# Altium PCB NodeCardWithCanBackup.PcbDoc
Units mm, origin at the board's own origin, x right, y up, seen from the top; angles counter-clockwise.
Board outline 199 x 48.5 mm, 8 copper layers (Top Layer, Internal Plane 1, Internal Plane 2, Internal Plane 3, Internal Plane 4, Internal Plane 5, Internal Plane 6, Bottom Layer), stack 0.605 mm thick; 93 components, 51 nets, 319 pads, 0 vias.
Unrouted connection lines stored in the file: 144.
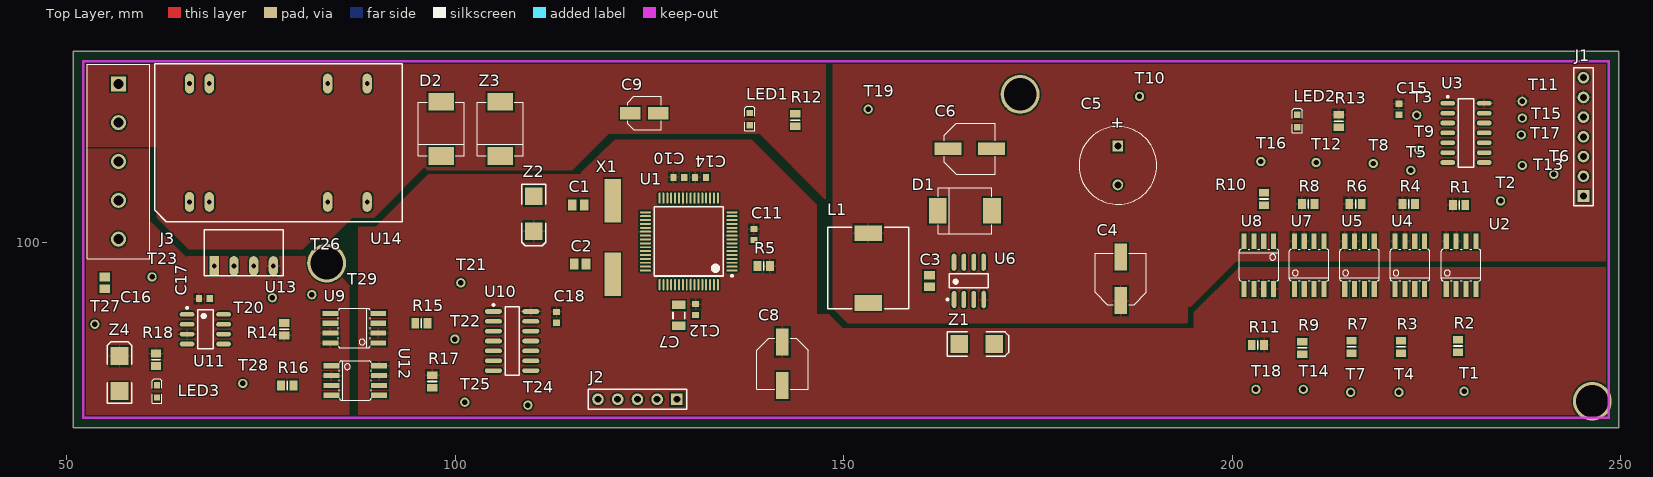
[diagram p0: Top Layer view]
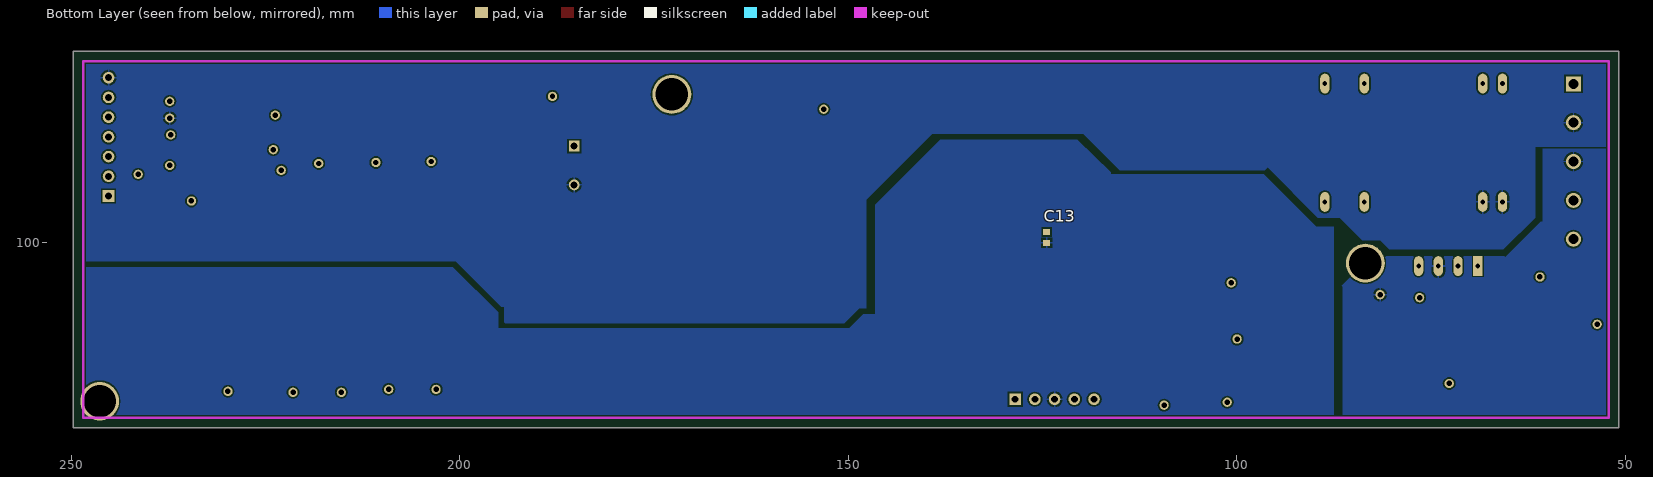
[diagram p1: Bottom Layer view, seen from below]
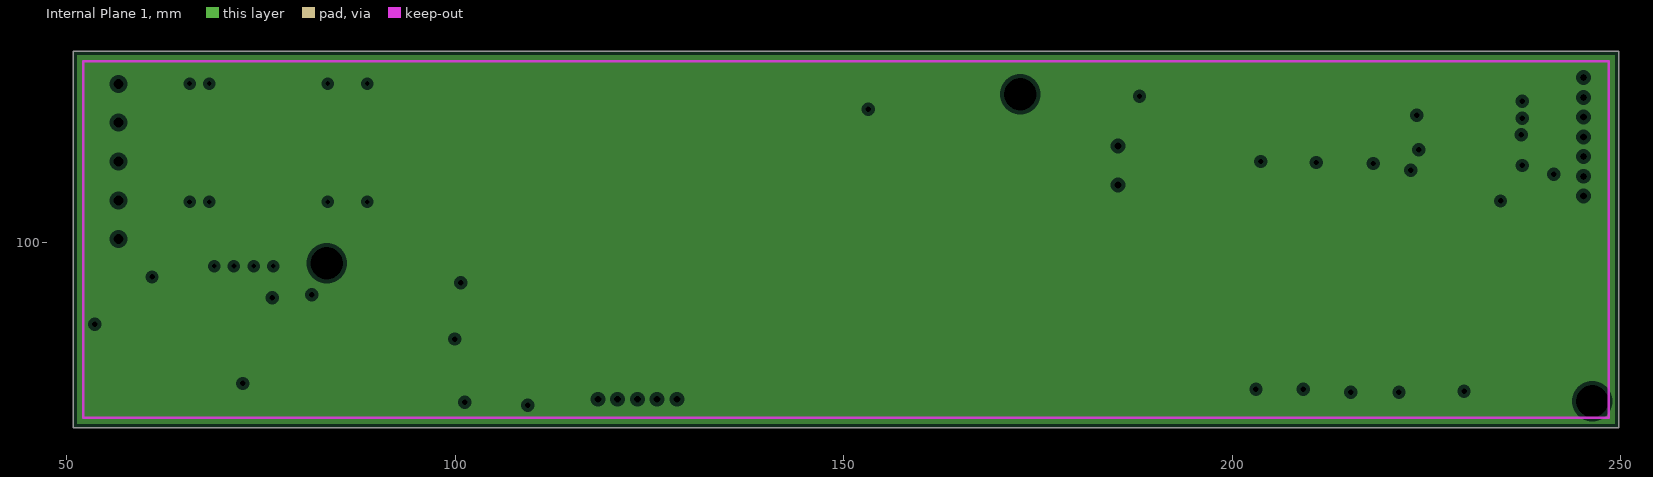
[diagram p2: Internal Plane 1, clearances drawn from the general rule]
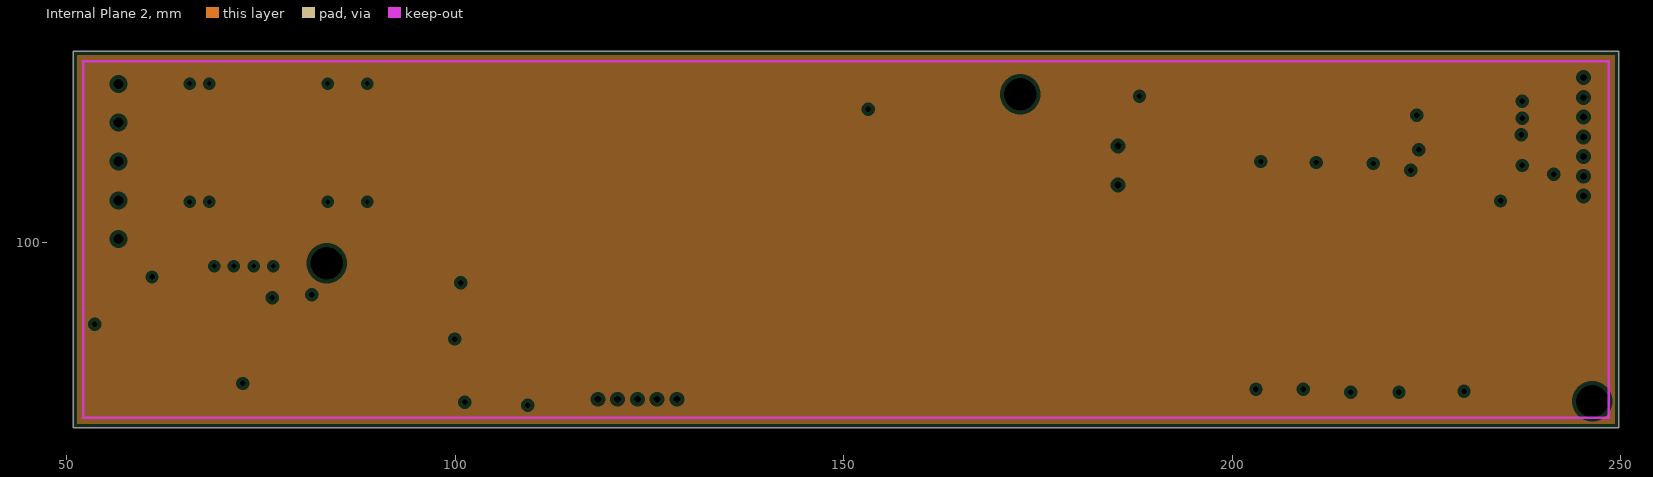
[diagram p3: Internal Plane 2, clearances drawn from the general rule]
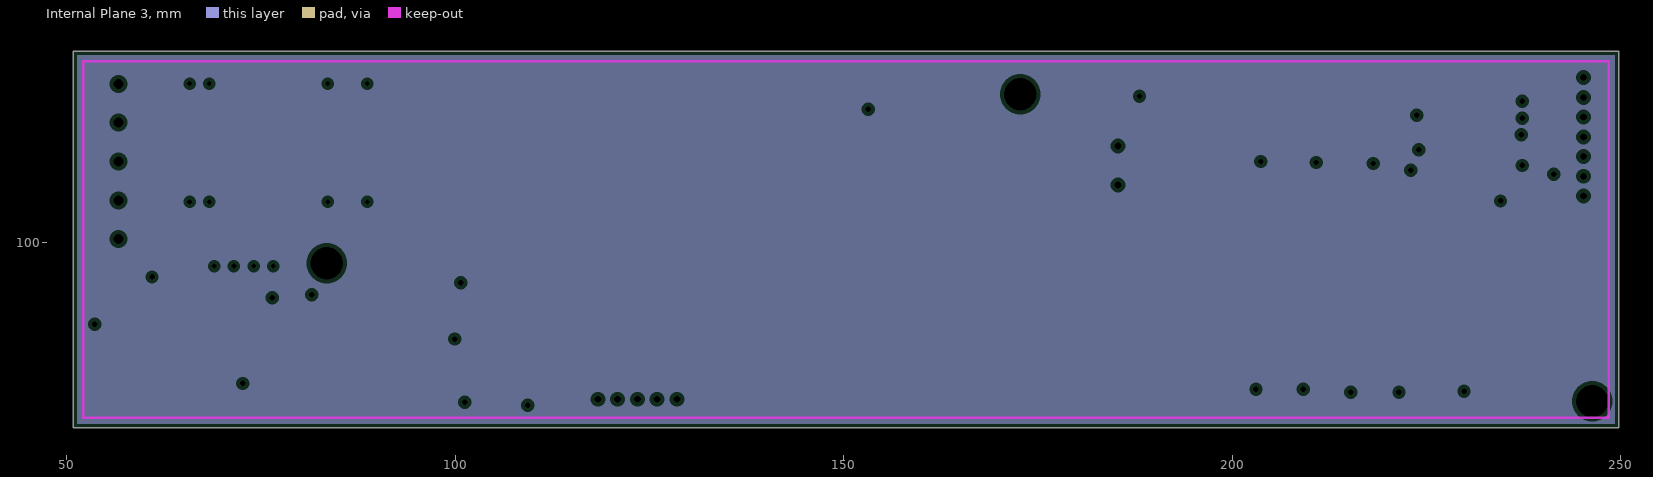
[diagram p4: Internal Plane 3, clearances drawn from the general rule]
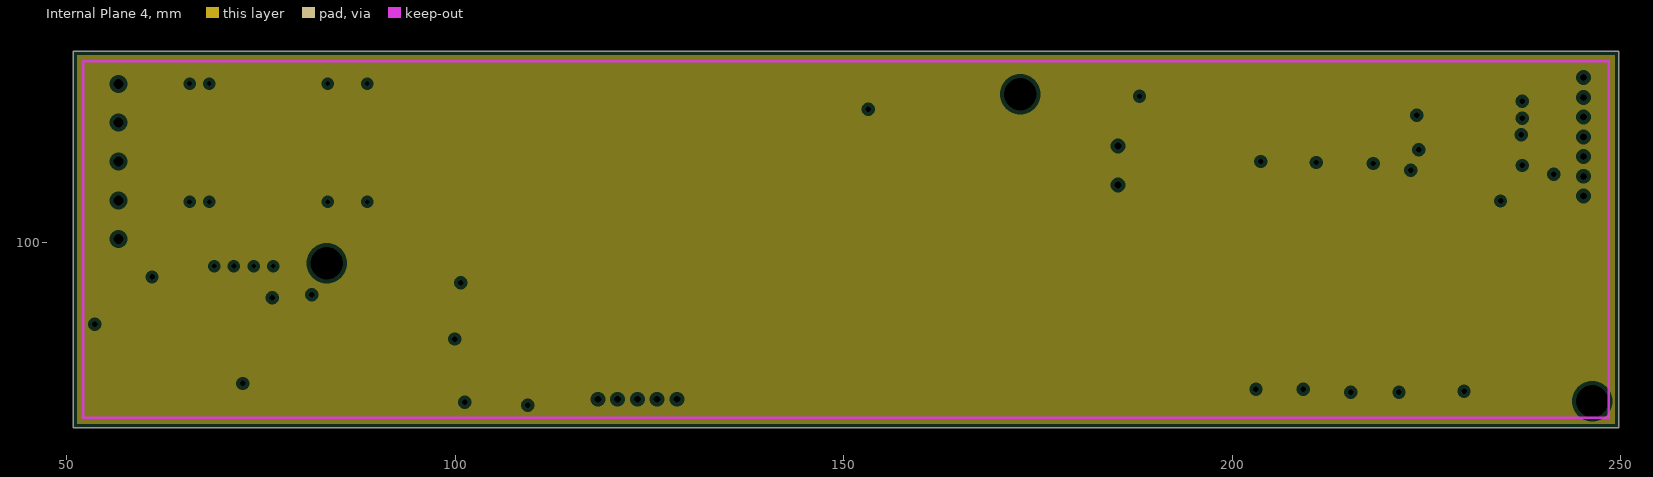
[diagram p5: Internal Plane 4, clearances drawn from the general rule]
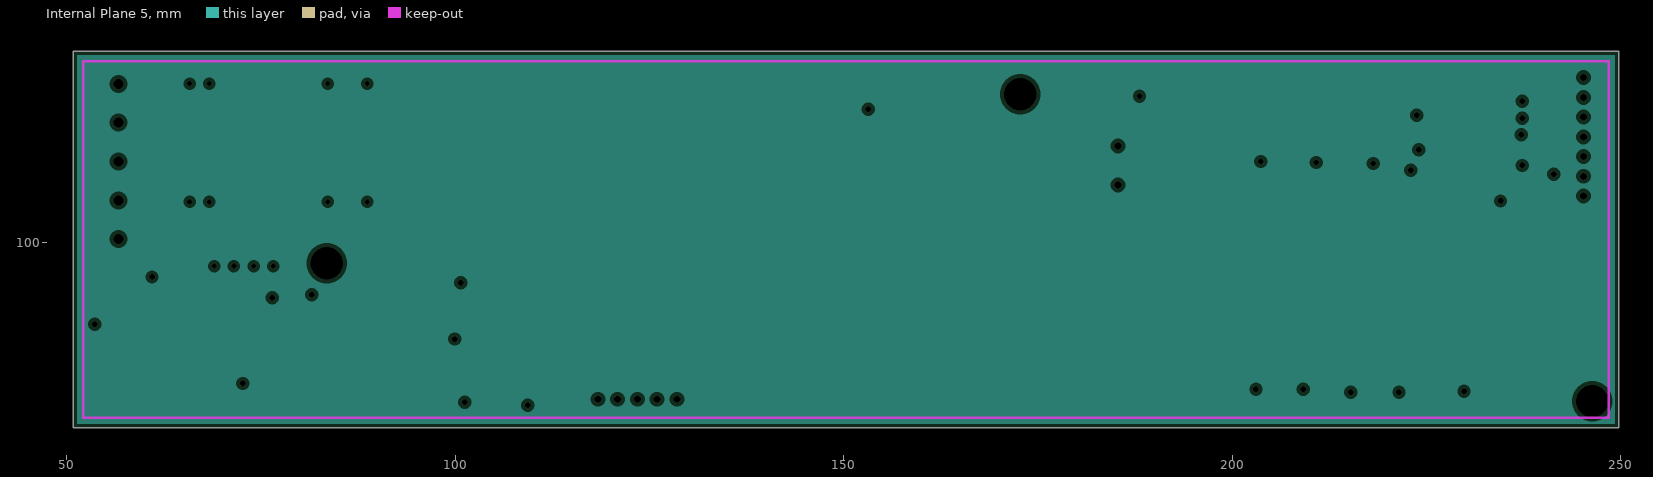
[diagram p6: Internal Plane 5, clearances drawn from the general rule]
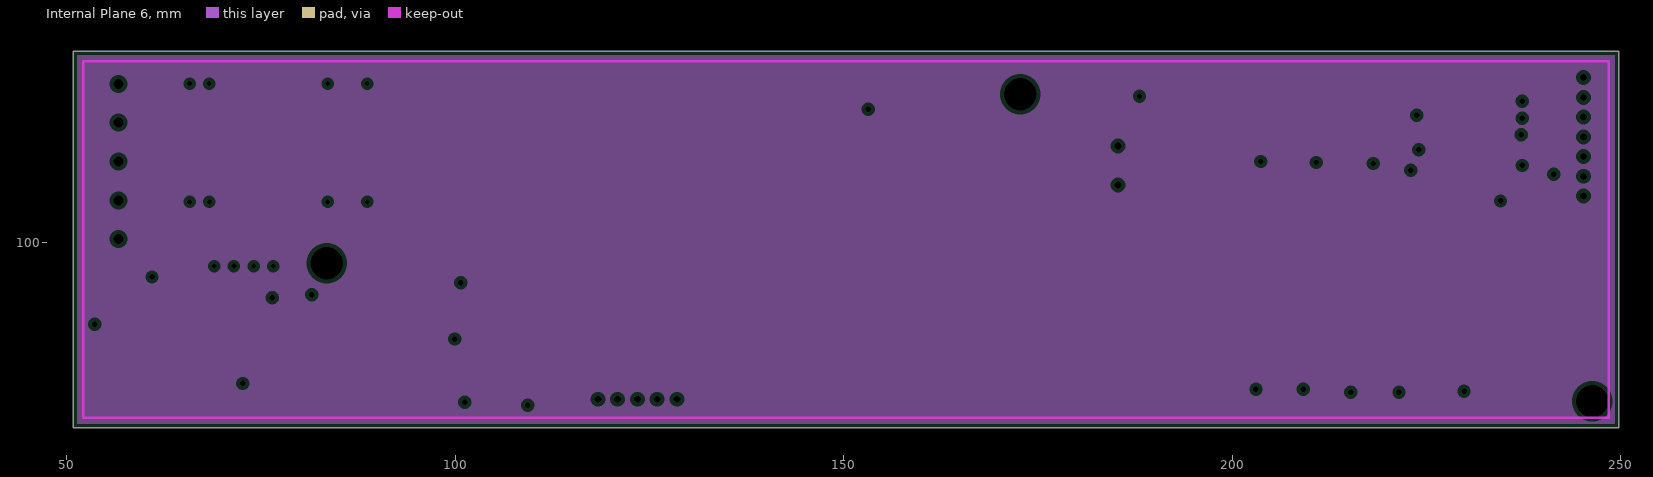
[diagram p7: Internal Plane 6, clearances drawn from the general rule]

## Layer stack, top to bottom
Top Solder: solder mask 0.0102, Solder Resist, Dk 3.5
Top Layer: signal copper 0.0356
Internal Plane 1: plane copper 0.0356
Internal Plane 2: plane copper 0.0356
Internal Plane 3: plane copper 0.0356
Internal Plane 4: plane copper 0.0356
Internal Plane 5: plane copper 0.0356
Internal Plane 6: plane copper 0.0356
Dielectric 1: dielectric 0.32, FR-4, Dk 4.8
Bottom Layer: signal copper 0.0356
Bottom Solder: solder mask 0.0102, Solder Resist, Dk 3.5

## Board outline
50.8,76.2 249.8,76.2 249.8,124.7 50.8,124.7

## Design rules (kind name [scope] priority, off if disabled: settings)
Clearance [All] p1: gap=0.2
PlaneClearance [All] p1: clearance=0.508
PlaneConnect [All] p1: planeconnectstyle=Relief reliefexpansion=0.508 reliefentries=4 reliefconductorwidth=0.254 reliefairgap=0.254
PolygonConnect [All] p1: connectstyle=Relief reliefconductorwidth=0.254 reliefentries=4 polygonreliefangle="90 Angle" airgapwidth=0.254
RoomDefinition NodeCardWithCan [InComponentClass('NodeCardWithCan')] p1: confinementstyle=ConfineIn formatcopy=TRUE lockcomponents=FALSE outline -0.635,0 50.165,0 50.165,25.4 -0.635,25.4
RoutingVias [All] p1: holewidth=0.6 width=1 viastyle="Through Hole" minholewidth=0.711 minwidth=1.27 maxholewidth=0.711 maxwidth=1.27
SolderMaskExpansion [All] p1: expansion=0.127
Width Power_Width [(InNet('CTRLGND') OR InNet('CTRLVCC+3.3') OR InNet('INPUTGND') OR InNet('INPUTVCC') OR InNet('MAINGND') OR InNet('MAINPOWER+24') OR InNet('OUTVCC+5'))] p1: maxlimit=1 minlimit=0.2 preferedwidth=0.45 minimp=50.000000 maximp=50.000000 favimp=50.000000
Width [All] p2: maxlimit=0.2 minlimit=0.2 preferedwidth=0.2
28 further rules are at their usual default settings.

## Components (designator, comment, footprint, x,y, rotation, side; value= is the part's Value field where it differs from the comment)
C1 "Cap" C0805 115.824,104.902 r0 top
C2 "Cap" C0805 116.078,97.282 r0 top
C3 "Cap" C0805 161.036,95.123 r90 top
C4 "100uF" "WCAP-PSLP 6.3x5.8x2.2" 185.674,95.377 r90 top
C5 "220uF" "WCAP-PTG5 10x12.5x5x0.6" 185.293,109.982 r270 top
C6 "22 μF" "WCAP-PSLP 6.3x5.8x2.2" 166.243,112.141 r0 top
C7 "Cap" C1206 128.778,90.678 r90 top
C8 "100uF" "WCAP-PSLP 6.3x5.8x2.2" 142.113,84.455 r270 top
C9 "22uF" "WCAP-PSLP 4x5.5x1" 124.333,116.713 r0 top
C10 "Cap" 1608[0603] 128.778,108.458 r180 top
C11 "Cap" 1608[0603] 138.43,101.092 r90 top
C12 "Cap" 1608[0603] 130.937,91.44 r90 top
C13 "Cap" 1608[0603] 124.46,100.711 r90 bottom
C14 "Cap" 1608[0603] 131.572,108.458 r180 top
C15 "Cap" 1608[0603] 221.488,117.221 r90 top
C16 "Cap" C0805 54.864,94.869 r90 top
C17 "Cap" 1608[0603] 67.691,92.837 r180 top
C18 "Cap" 1608[0603] 113.03,90.424 r90 top
D1 "Diode" DO-214AB_Unidirectional 165.608,104.14 r0 top
D2 "Diode" DO-214AB_Unidirectional 98.171,114.681 r90 top
J1 "Header 7" HDR1X7 245.237,106.045 r90 top
J2 "Header 5" HDR1X5 128.524,79.883 r180 top
J3 "691241710005" 691241710005 56.642,110.49 r270 top
L1 "68uH" "WE-PD 1030" 153.162,96.774 r90 top
LED1 "150060GS75000" LED_0603_Green 137.922,115.951 r90 top
LED2 "150060GS75000" LED_0603_Green 208.407,115.697 r90 top
LED3 "150060GS75000" LED_0603_Green 61.595,80.899 r90 top
R1 "Res1" 6-0805_L 229.235,104.902 r180 top
R2 "Res1" 6-0805_L 229.108,86.741 r90 top
R3 "Res1" 6-0805_L 221.742,86.614 r90 top
R4 "Res1" 6-0805_L 222.758,105.029 r180 top
R5 "Res1" 6-0805_L 139.7,97.028 r0 top
R6 "Res1" 6-0805_L 215.9,105.029 r180 top
R7 "Res1" 6-0805_L 215.392,86.614 r90 top
R8 "Res1" 6-0805_L 209.804,105.029 r180 top
R9 "Res1" 6-0805_L 209.042,86.487 r90 top
R10 "Res1" 6-0805_L 204.089,105.664 r90 top
R11 "Res1" 6-0805_L 203.327,86.868 r180 top
R12 "Res1" 6-0805_L 143.764,115.824 r90 top
R13 "Res1" 6-0805_L 213.741,115.697 r90 top
R14 "Res1" 6-0805_L 77.978,88.9 r270 top
R15 "Res1" 6-0805_L 95.631,89.662 r180 top
R16 "Res1" 6-0805_L 78.359,81.661 r180 top
R17 "Res1" 6-0805_L 97.028,82.169 r270 top
R18 "Res1" 6-0805_L 61.468,84.963 r90 top
T1 "TestPoint" "Test Point" 1492.377,1344.168 r0 top
T2 "TestPoint" "Test Point" 1497.076,1368.679 r0 top
T3 "TestPoint" "Test Point" 1486.281,1379.728 r0 top
T4 "TestPoint" "Test Point" 1483.995,1344.041 r0 top
T5 "TestPoint" "Test Point" 1485.519,1372.616 r0 top
T6 "TestPoint" "Test Point" 1503.934,1372.108 r0 top
T7 "TestPoint" "Test Point" 1477.772,1344.041 r0 top
T8 "TestPoint" "Test Point" 1480.693,1373.505 r0 top
T9 "TestPoint" "Test Point" 1486.535,1375.283 r0 top
T10 "TestPoint" "Test Point" -1075.182,1381.379 r90 top
T11 "TestPoint" "Test Point" 1499.87,1381.506 r0 top
T12 "TestPoint" "Test Point" -1052.449,1372.87 r90 top
T13 "TestPoint" "Test Point" -1025.906,1372.489 r90 top
T14 "TestPoint" "Test Point" -1054.1,1343.66 r90 top
T15 "TestPoint" "Test Point" -1025.906,1378.585 r90 top
T16 "TestPoint" "Test Point" -1059.561,1372.997 r90 top
T17 "TestPoint" "Test Point" -1026.033,1376.426 r90 top
T18 "TestPoint" "Test Point" -1060.196,1343.66 r90 top
T19 "TestPoint" "Test Point" -1110.107,1379.728 r90 top
T20 "TestPoint" "Test Point" -1186.815,1355.471 r90 top
T21 "TestPoint" "Test Point" 1363.218,1358.138 r0 top
T22 "TestPoint" "Test Point" -1163.32,1350.137 r90 top
T23 "TestPoint" "Test Point" -1202.309,1358.138 r90 top
T24 "TestPoint" "Test Point" -1153.922,1341.628 r90 top
T25 "TestPoint" "Test Point" -1162.05,1342.009 r90 top
T26 "TestPoint" "Test Point" -1181.354,1360.043 r90 top
T27 "TestPoint" "Test Point" -1209.675,1352.042 r90 top
T28 "TestPoint" "Test Point" -1190.625,1344.422 r90 top
T29 "TestPoint" "Test Point" -1181.735,1355.852 r90 top
U1 "DSPIC33EP512MC806-I/PT" MCHP-TQFP-PT64_N 130.048,100.203 r180 top
U2 "HCPL0601" SOIC08 229.489,97.155 r0 top
U3 "SN74HC14D" D014_L 230.124,114.173 r0 top
U4 "HCPL0601" SOIC08 222.885,97.155 r0 top
U5 "HCPL0601" SOIC08 216.408,97.155 r0 top
U6 "LM2675M-5.0/NOPB" M08A_N 166.116,95.123 r90 top
U7 "HCPL0601" SOIC08 209.931,97.155 r0 top
U8 "HCPL0601" SOIC08 203.454,97.155 r180 top
U9 "HCPL0601" SOIC08 86.995,89.027 r90 top
U10 "SN74HC14D" D014_N 107.315,87.376 r0 top
U11 "SN65HVD1050D" D8_L 67.818,88.9 r0 top
U12 "HCPL0601" SOIC08 87.122,82.296 r270 top
U13 "NKE0305SC" NKE0305SC 68.961,97.028 r90 top
U14 "TEN 3-2410N" "TRACO ISOLATED CONVERTER" 63.246,105.283 r90 top
X1 "ABLS2-8.000MHZ-D4Y-T" XTAL1140X470X330 120.269,100.711 r90 top
Z1 "Zener" SMB 167.132,86.995 r0 top
Z2 "Zener" SMB 110.109,103.759 r270 top
Z3 "36V zener" DO-214AB_Unidirectional 105.791,114.681 r90 top
Z4 "Zener" SMB 56.769,83.185 r90 top

## Footprints (in the part's own frame and the unit in brackets; to place one, negate y for a bottom-side part, rotate by r counter-clockwise, add the part's x,y. Pads: shape width x height; smd on the part's side, far side on the other; paste and mask are expansions set on the pad)
6-0805_L [mm] "Chip Resistor, Body 2.0x1.2mm, IPC High Density"
  rect 1x1.3 smd: 1(-0.8,0) 2(0.8,0)
  silkscreen extent 0,-0.55 0,0.55, body extent -1.07,-0.7 1.07,0.7, height 0.7
1608[0603] [mm] "Chip Capacitor, Body 1.6x0.8mm, IPC High Density"
  rect 0.8x0.9 smd: 1(-0.7,0) 2(0.7,0)
  body extent -0.87,-0.48 0.87,0.48, height 1.3
691241710005 [mm] "Serie 2417 - 5.00 mm _ 5 pins"
  rect 1.95x1.95 hole 1.3: 1(-10,0)
  round 1.95 hole 1.3: 2(-5,0) 3(0,0) 4(5,0) 5(10,0)
  silkscreen extent -12.5,-4.05 12.5,4.05, body extent -12.5,-4.05 12.5,4.05, height 10.1
C0805 [mm] "Chip Capacitor, Body 2.0x1.3mm, IPC High Density"
  rect 1.1x1.4 smd: 1(-0.75,0) 2(0.75,0)
  body extent -1.1,-0.72 1.1,0.72, height 1.4
C1206 [mm] "Chip Capacitor, Body 3.2x1.6mm, IPC High Density"
  rect 1.1x1.7 smd: 1(-1.35,0) 2(1.35,0)
  silkscreen extent -0.4,-0.75 0.4,0.75, body extent -1.7,-0.9 1.7,0.9, height 1.3
D8_L [mm] "SOIC, 8-Leads, Body 4.9x3.9mm, Pitch 1.27mm, IPC High Density"
  oval 1.9x0.6 smd: 1(-2.35,1.905) 2(-2.35,0.635) 3(-2.35,-0.635) 4(-2.35,-1.905) 5(2.35,-1.905) 6(2.35,-0.635) 7(2.35,0.635) 8(2.35,1.905)
  silkscreen extent -2.47,-2.5 1,2.88, body extent -2,-2.5 2,2.5, height 1.75
D014_L [mm] "SOIC, 14-Leads, Body 8.7x3.9mm, Pitch 1.27mm, IPC High Density"
  oval 1.9x0.6 smd: 1(-2.35,3.81) 2(-2.35,2.54) 3(-2.35,1.27) 4(-2.35,0) 5(-2.35,-1.27) 6(-2.35,-2.54) 7(-2.35,-3.81) 8(2.35,-3.81) 9(2.35,-2.54) 10(2.35,-1.27) 11(2.35,0) 12(2.35,1.27) 13(2.35,2.54) 14(2.35,3.81)
  silkscreen extent -2.47,-4.4 1,4.78, body extent -1.95,-4.33 1.95,4.33, height 1.75
D014_N [mm] "SOIC, 14-Leads, Body 8.7x3.9mm, Pitch 1.27mm, IPC Medium Density"
  oval 2.2x0.6 smd: 1(-2.4,3.81) 2(-2.4,2.54) 3(-2.4,1.27) 4(-2.4,0) 5(-2.4,-1.27) 6(-2.4,-2.54) 7(-2.4,-3.81) 8(2.4,-3.81) 9(2.4,-2.54) 10(2.4,-1.27) 11(2.4,0) 12(2.4,1.27) 13(2.4,2.54) 14(2.4,3.81)
  silkscreen extent -2.52,-4.4 0.9,4.78, body extent -1.95,-4.33 1.95,4.33, height 1.75
DO-214AB_Unidirectional [mm] "WE-TVSP Power TVS Diode, DO-214AB, Unidirectional"
  rect 2.3x3.3 smd: 1(-3.5,0) 2(3.5,0)
  silkscreen extent -3.43,-2.95 3.43,2.95, body extent -3.97,-2.95 3.97,2.95, height 2.5
HDR1X5 [mm] "Connector; Header; 5 Position"
  rect 1.5x1.5 hole 0.9: 1(0,0)
  round 1.5 hole 0.9: 2(2.54,0) 3(5.08,0) 4(7.62,0) 5(10.16,0)
  silkscreen extent -1.27,-1.27 11.43,1.27
HDR1X7 [mm] "Connector; Header; 7 Position"
  rect 1.5x1.5 hole 0.9: 1(0,0)
  round 1.5 hole 0.9: 2(2.54,0) 3(5.08,0) 4(7.62,0) 5(10.16,0) 6(12.7,0) 7(15.24,0)
  silkscreen extent -1.27,-1.27 16.51,1.27
LED_0603_Green [mm] "Chip LED, 2-Leads, Body 1.6x0.8mm, IPC Medium Density"
  rect 0.8x0.8 smd: 1(-0.8,0) 2(0.8,0)
  silkscreen extent -1.52,-0.64 1.65,0.64, body extent -0.8,-0.4 0.8,0.4, height 0.7
M08A_N [mm] "SOIC, 8-Leads, Body 4.9x3.9mm, Pitch 1.27mm, IPC Medium Density"
  oval 2.2x0.6 smd: 1(-2.4,1.905) 2(-2.4,0.635) 3(-2.4,-0.635) 4(-2.4,-1.905) 5(2.4,-1.905) 6(2.4,-0.635) 7(2.4,0.635) 8(2.4,1.905)
  silkscreen extent -2.52,-2.5 0.9,2.88, body extent -2,-2.5 2,2.5, height 1.75
MCHP-TQFP-PT64_N [mm] "TQFP, 64-Leads, Body 10x10mm, Pitch 0.5mm, IPC Medium Density"
  oval 1.45x0.25 smd: 1(-5.575,3.75) 2(-5.575,3.25) 3(-5.575,2.75) 4(-5.575,2.25) 5(-5.575,1.75) 6(-5.575,1.25) 7(-5.575,0.75) 8(-5.575,0.25) 9(-5.575,-0.25) 10(-5.575,-0.75) 11(-5.575,-1.25) 12(-5.575,-1.75) 13(-5.575,-2.25) 14(-5.575,-2.75) 15(-5.575,-3.25) 16(-5.575,-3.75) 33(5.575,-3.75) 34(5.575,-3.25) 35(5.575,-2.75) 36(5.575,-2.25) 37(5.575,-1.75) 38(5.575,-1.25) 39(5.575,-0.75) 40(5.575,-0.25) 41(5.575,0.25) 42(5.575,0.75) 43(5.575,1.25) 44(5.575,1.75) 45(5.575,2.25) 46(5.575,2.75) 47(5.575,3.25) 48(5.575,3.75)
  oval 0.25x1.45 smd: 17(-3.75,-5.575) 18(-3.25,-5.575) 19(-2.75,-5.575) 20(-2.25,-5.575) 21(-1.75,-5.575) 22(-1.25,-5.575) 23(-0.75,-5.575) 24(-0.25,-5.575) 25(0.25,-5.575) 26(0.75,-5.575) 27(1.25,-5.575) 28(1.75,-5.575) 29(2.25,-5.575) 30(2.75,-5.575) 31(3.25,-5.575) 32(3.75,-5.575) 49(3.75,5.575) 50(3.25,5.575) 51(2.75,5.575) 52(2.25,5.575) 53(1.75,5.575) 54(1.25,5.575) 55(0.75,5.575) 56(0.25,5.575) 57(-0.25,5.575) 58(-0.75,5.575) 59(-1.25,5.575) 60(-1.75,5.575) 61(-2.25,5.575) 62(-2.75,5.575) 63(-3.25,5.575) 64(-3.75,5.575)
  silkscreen extent -5.7,-4.45 4.45,4.55, body extent -5,-5 5,5, height 1.2
NKE0305SC [mm]
  rect 2.54x1.2 hole 0.6: 1(0,0)
  oval 2.54x1.2 hole 0.6: 2(0,-2.54) 3(0,-5.08) 4(0,-7.62)
  silkscreen extent -1.27,-8.89 4.7,1.27
SMB [mm] "DO-214-AA/SMB; 2 C-Bend Leads; Body 5.3 x 3.6 mm, inc. leads (LxW)"
  rect 2.3x2.3 smd: 1(-2.25,0) 2(2.25,0)
  silkscreen extent -3.8,-1.55 4.1,1.55
SOIC08 [mil]
  rect 26x80 smd paste-1000 mask-1000: 1(-75,-121) 2(-25,-121) 3(25,-121) 4(75,-121) 5(75,121) 6(25,121) 7(-25,121) 8(-75,121)
  silkscreen extent -100,-80 100,80
"Test Point" [mm] "Test Point"
  round 1.2 hole 0.7: 1(-1262.507,-1263.269)
"TRACO ISOLATED CONVERTER" [mm]
  oval 2.54x1.2 hole 0.6: 2(0,-2.54) 3(0,-5.08) 9(0,-20.32) 11(0,-25.4) 14(15.24,-25.4) 16(15.24,-20.32) 22(15.24,-5.08) 23(15.24,-2.54)
  silkscreen extent -2.54,-29.9 17.78,1.95
"WCAP-PSLP 4x5.5x1" [mm] "Polarized capacitors, Aluminum Polymer Capacitors, 2-Leads, Body 4x5.5x1"
  rect 2.6x1.6 smd: 1(-1.8,0) 2(1.8,0)
  silkscreen extent -2.15,-2.15 2.15,2.15, body extent -2.5,-2.15 2.5,2.15, height 5.45
"WCAP-PSLP 6.3x5.8x2.2" [mm] "Polarized capacitors, Aluminum Polymer Capacitors, 2-Leads, Body 6.3x5.8x2.2"
  rect 3.5x1.6 smd: 1(-2.8,0) 2(2.8,0)
  silkscreen extent -3.3,-3.3 3.3,3.3, body extent -3.65,-3.3 3.65,3.3, height 5.75
"WCAP-PTG5 10x12.5x5x0.6" [mm] "Polarized capacitors, Aluminum Polymer Capacitors, 2-Leads, Body 10x12.5x5x0.6"
  rect 1.4x1.4 hole 0.9: 1(-2.5,0)
  round 1.4 hole 0.9: 2(2.5,0)
  silkscreen extent -5,-5 5,5, body extent -4.96,-4.97 4.99,5, height 12.71
"WE-PD 1030" [mm] "SMD Inductor, 2-Leads, Body 10,0x10,0mm"
  rect 2x3.5 smd: 1(-4.5,0) 2(4.5,0)
  silkscreen extent -5.25,-5.2 5.25,5.2, body extent -5,-5 5,5, height 2.7
XTAL1140X470X330 [mm]
  rect 5.6x2.1 smd paste-25.4 mask-25.4: 1(-4.752,-0.001) 2(4.748,-0.001)

## Part data
C1 C2 C3 C7 C10 C11 C12 C13 C14 C15 C16 C17 C18: "Capacitor"
C4: library part "WCAP-PSLP 6.3x5.8x2.2 875105544003", "WCAP-PSLP Aluminum Polymer Capacitors , 22 µF; + / - 20%; 16 V , 6,3 x 5,8"
C5: library part "WCAP-PTG5 10x12.5x5x0.6 870025175010", "WCAP-PTG5 Aluminum Polymer Capacitors , 1000 µF; + / - 20%; 6,3 V , 10 x 12,5"
C6: library part "WCAP-PSLP 6.3x5.8x2.2 875105544003", "WCAP-PSLP Aluminum Polymer Capacitors , 22 µF; + / - 20%; 50 V , 6,3 x 5,8"
C8: library part "WCAP-PSLP 6.3x5.8x2.2 875105544003", "WCAP-PSLP Aluminum Polymer Capacitors , 22 µF; + / - 20%; 16V , 6,3 x 5,8"
C9: library part "WCAP-PSLP 4x5.5x1 875105240001", "WCAP-PSLP Aluminum Polymer Capacitors , 10 µF; + / - 20%; 10 V , 4 x 5,5"
D1 D2: "Default Diode"
J1: "Header, 7-Pin"
J2: "Header, 5-Pin"
J3: "WR-TBL Horizontal Cable Entry With Rising Cage Clamp,Serie 2417 - 5.00 mm"
L1: library part "WE-PD 1030, 7447713015", "SMD-Shielded Power Inductor WE-PD, L=1.50 µH"
LED1 LED2 LED3: library part "WL-SMCW 0603  150060GS75000", "SMD mono-color Chip LED, WL-SMCW, Green"
R1 R2 R3 R4 R5 R6 R7 R8 R9 R10 R11 R12 R13 R14 R15 R16 R17 R18: "Resistor"
T1 T2 T3 T4 T5 T6 T7 T8 T9 T10 T11 T12 T13 T14 T15 T16 T17 T18 T19 T20 T21 T22 T23 T24 T25 T26 T27 T28 T29: library part "Test Point", "Test Point"
U1: "16-Bit Microcontroller and Digital Signal Controller with High-Speed PWM, USB and Advanced Analog, 70 MIPS, 53 I/O, EPMP, -40 to 85 degC, 64-pin TQFP (PT64), Tray"
U3 U10: "Hex Schmitt-Trigger Inverter"
U6: "SIMPLE SWITCHER® Power Converter High Efficiency 1A Step-Down Voltage Regulator, 8-pin Narrow SOIC, Pb-Free"
U11: "High-Speed EMC Optimized CAN Transceiver, 70 mA, 5 V, -40 to 125 degC, 8-pin SOIC (D), Green (RoHS & no Sb/Br)"
U13: "muRata 3.3 to 5.0 isolated converter"
U14: "Traco 24/3.3 isolated converter"
Z1 Z2 Z3 Z4: library part "WE-TVSP DO-214AB, 824540102", "WE-TVSP Power TVS Diode, Unidirectional, 1500 W, 100 VDC"

## Free pads (board coordinates)
  round 5 hole 4.2: 0(83.439,97.409) 0(172.72,119.126) 0(246.38,79.629)

## Nets (pads, with @x,y where several pads share a name; then routed paths per layer and width w, separated by ;. In a path a pad name is that pad's centre, name@x,y a point inside that pad or via, vN(x,y) a via of type N, cw(c..) or ccw(c..) an arc to the next point about the centre after c; other vN are vias at no path point)
CANH: C16.2 J3.5 T23.1 U11.7
CANL: C16.1 J3.4 T27.1 U11.6
CANRX: T24.1 U1.31 U10.6
CANTX: T21.1 U1.32 U10.1
CLOCK: R2.1 T1.1 U1.50
CTRLGND: C1.1 C2.1 C7.1 C8.2 C9.2 C10.1 C11.1 C12.1 C13.1 C14.1 C18.1 J2.3 LED1.2 U1.9 U1.20 U1.25 U1.41 U2.3 U4.3 U5.3 U7.3 U8.5 U10.7 U10.11 U10.13 U12.5 U13.1 U14.16 Z2.1
CTRLVCC+3.3: C8.1 C9.1 C10.2 C11.2 C12.2 C13.2 C14.2 C18.2 R5.2 R11.1 R12.2 R17.1 T19.1 U1.10 U1.19 U1.26 U1.38 U1.57 U8.7 U8.8 U9.2 U10.14 U12.7 U12.8 U13.2 U14.14 Z2.2
DATA_IN: R11.2 T18.1 U1.54 U8.6
DATA_OUT: R9.1 T14.1 U1.53
INPUTGND: C17.1 J3.3 LED3.2 T29.1 U9.5 U11.2 U11.8 U13.3 Z4.1
INPUTVCC: C17.2 R14.2 R18.2 T26.1 U9.7 U9.8 U11.3 U12.2 U13.4 Z4.2
MAINGND: C4.2 C5.2 C6.2 C15.1 D1.2 J1.7 J3.2 LED2.2 T15.1 U2.5 U3.7 U3.13 U4.5 U5.5 U6.6 U7.5 U8.3 U14.2 U14.3 Z1.1 Z3.2
MAINPOWER+24: C5.1 C6.1 D2.1 T10.1 U6.7 U14.22 U14.23 Z3.1
NetC1_2: C1.2 U1.39 X1.2
NetC2_2: C2.2 U1.40 X1.1
NetC3_1: C3.1 U6.1
NetC3_2: C3.2 D1.1 L1.1 U6.8
NetC7_2: C7.2 U1.56
NetD2_2: D2.2 J3.1
NetJ1_1: J1.1 T3.1 U3.2
NetJ1_2: J1.2 T6.1 U3.4
NetJ1_3: J1.3 T9.1 U3.6
NetJ1_4: J1.4 T13.1 U3.8
NetJ1_5: J1.5 T17.1 U3.11
NetLED1_1: LED1.1 R12.1
NetLED2_1: LED2.1 R13.1
NetLED3_1: LED3.1 R18.1
NetR1_1: R1.1 T2.1 U2.6 U3.1
NetR2_2: R2.2 U2.2
NetR3_2: R3.2 U4.2
NetR4_1: R4.1 T5.1 U3.3 U4.6
NetR6_1: R6.1 T8.1 U3.5 U5.6
NetR7_2: R7.2 U5.2
NetR8_1: R8.1 T12.1 U3.9 U7.6
NetR9_2: R9.2 U7.2
NetR10_1: R10.1 U8.2
NetR10_2: R10.2 T16.1 U3.10
NetR14_1: R14.1 T20.1 U9.6 U11.1
NetR15_1: R15.1 T22.1 U10.4
NetR15_2: R15.2 U9.3
NetR16_1: R16.1 U12.3
NetR16_2: R16.2 T28.1 U11.4
NetR17_2: R17.2 T25.1 U10.9 U12.6
NetU10_2: U10.2 U10.3
NetU10_5: U10.5 U10.8
OUT_ENABLE: R7.1 T7.1 U1.52
OUTVCC+5: C4.1 C15.2 J1.6 L1.2 R1.2 R4.2 R6.2 R8.2 R13.2 T11.1 U2.7 U2.8 U3.14 U4.7 U4.8 U5.7 U5.8 U6.4 U7.7 U7.8 Z1.2
PGC: J2.5 U1.17
PGD: J2.4 U1.18
STROBE: R3.1 T4.1 U1.51
VPP: J2.1 R5.1 U1.7
pads on no net: J2.2 U1.1 U1.2 U1.3 U1.4 U1.5 U1.6 U1.8 U1.11 U1.12 U1.13 U1.14 U1.15 U1.16 U1.21 U1.22 U1.23 U1.24 U1.27 U1.28 U1.29 U1.30 U1.33 U1.34 U1.35 U1.36 U1.37 U1.42 U1.43 U1.44 U1.45 U1.46 U1.47 U1.48 U1.49 U1.55 U1.58 U1.59 U1.60 U1.61 U1.62 U1.63 U1.64 U2.1 U2.4 U3.12 U4.1 U4.4 U5.1 U5.4 U6.2 U6.3 U6.5 U7.1 U7.4 U8.1 U8.4 U9.1 U9.4 U10.10 U10.12 U11.5 U12.1 U12.4 U14.9 U14.11

## Polygon pours and split planes (outlines as drawn)
INPUTGND on Bottom Layer "Bottom Layer-No Net" (solid, pour order 9): 52.1,77.5 52.1,112.141 60.579,112.141 60.706,112.268 60.579,112.141 60.579,102.743 60.833,102.743 65.405,98.171 65.532,98.298 81.153,98.298 82.677,98.298 86.487,94.488 86.36,94.361 86.36,77.5 52.1,77.5
CTRLGND on Bottom Layer "Bottom Layer-No Net" (solid, pour order 11): 87.503,77.5 87.503,102.108 89.789,102.108 96.012,108.331 96.52,108.839 116.205,108.839 116.205,109.093 120.523,113.284 120.65,113.284 138.049,113.284 138.176,113.284 146.431,105.029 146.558,104.902 146.558,90.805 148.082,90.805 149.86,89.027 195.072,89.027 195.072,91.059 200.914,96.901 248.5,96.901 248.5,77.5 87.63,77.5
MAINGND on Bottom Layer "Bottom Layer-No Net" (solid, pour order 14): 52.1,112.395 52.1,123.4 248.5,123.4 248.5,97.663 200.406,97.663 200.533,97.663 194.691,91.821 194.31,91.821 194.31,89.789 194.183,89.662 150.749,89.662 150.495,89.662 148.59,91.567 147.701,91.567 147.701,105.537 139.192,114.046 138.811,114.046 120.65,114.046 119.888,114.046 119.761,114.046 115.697,109.982 115.062,109.347 96.393,109.347 96.012,109.728 89.535,103.251 86.741,103.251 86.487,102.997 83.82,100.33 82.296,100.33 81.534,100.33 80.391,99.187 65.659,99.187 61.595,103.251 61.595,112.395 52.1,112.395
INPUTVCC on Top Layer "Bottom Layer-No Net" (solid, pour order 8): 52.07,77.47 52.07,112.111 60.549,112.111 60.676,112.238 60.549,112.111 60.549,102.713 60.803,102.713 65.375,98.141 65.502,98.268 81.123,98.268 82.647,98.268 86.457,94.458 86.33,94.331 86.33,77.47 52.07,77.47
CTRLVCC+3.3 on Top Layer "Bottom Layer-No Net" (solid, pour order 10): 87.503,77.5 87.503,102.108 89.789,102.108 96.012,108.331 96.52,108.839 116.205,108.839 116.205,109.093 120.523,113.284 120.65,113.284 138.049,113.284 138.176,113.284 146.431,105.029 146.558,104.902 146.558,90.805 148.082,90.805 149.86,89.027 195.072,89.027 195.072,91.059 200.914,96.901 248.5,96.901 248.5,77.5 87.63,77.5
no net on Top Layer "Bottom Layer-No Net" (solid, pour order 13): 52.1,112.395 52.1,123.039 147.701,123.039 147.701,111.252 147.701,107.823 147.701,105.537 139.192,114.046 138.811,114.046 120.65,114.046 119.888,114.046 119.761,114.046 115.697,109.982 115.062,109.347 96.393,109.347 96.012,109.728 89.535,103.251 86.741,103.251 86.487,102.997 83.82,100.33 82.296,100.33 81.534,100.33 80.391,99.187 65.659,99.187 61.595,103.251 61.595,112.395
OUTVCC+5 on Top Layer "Bottom Layer-No Net" (solid, pour order 12): 148.59,123.4 248.5,123.4 248.5,97.663 200.406,97.663 200.533,97.663 194.691,91.821 194.31,91.821 194.31,89.789 194.183,89.662 150.749,89.662 150.495,89.662 148.59,91.567 148.59,91.694 148.59,105.664

## Keep-outs
Keep-Out Layer:
  lines w0.3: 52.1,77.5 52.1,123.4 248.5,123.4 248.5,77.5 52.1,77.5

## Dimensions
52.1,77.5 to 52.1,123.4 on Mechanical 1
52.1,77.5 to 248.5,77.5 on Mechanical 1

## Text inside footprints (layer, text, board x,y; h text height)
C5: Top Overlay "+" at 184.556,116.307 h1.5 r270